# Allegro board DIF_1V2.brd
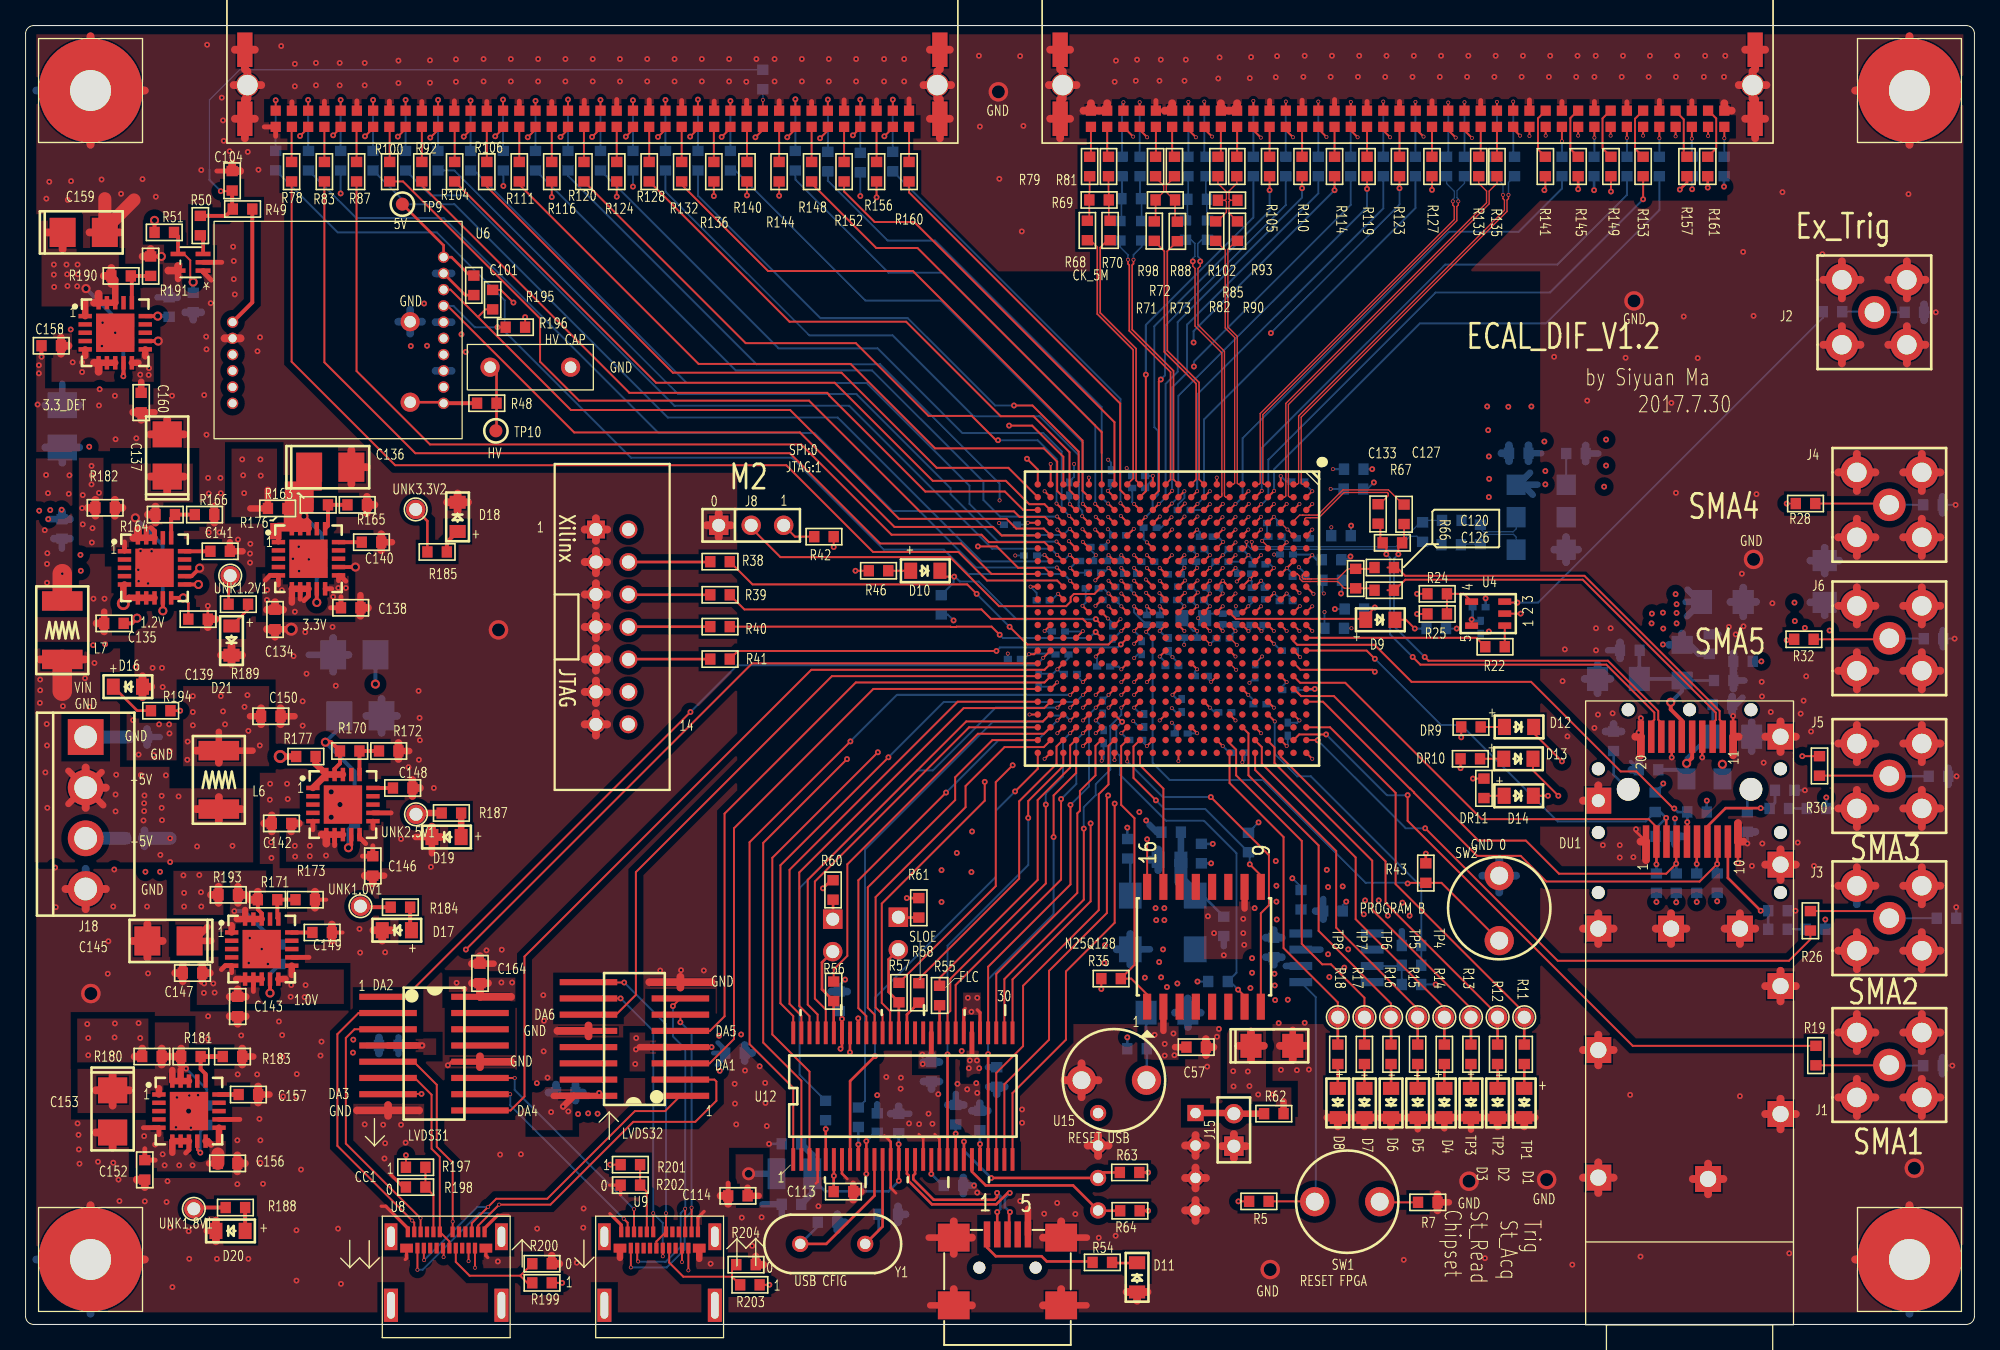
[diagram p0: board, top side]
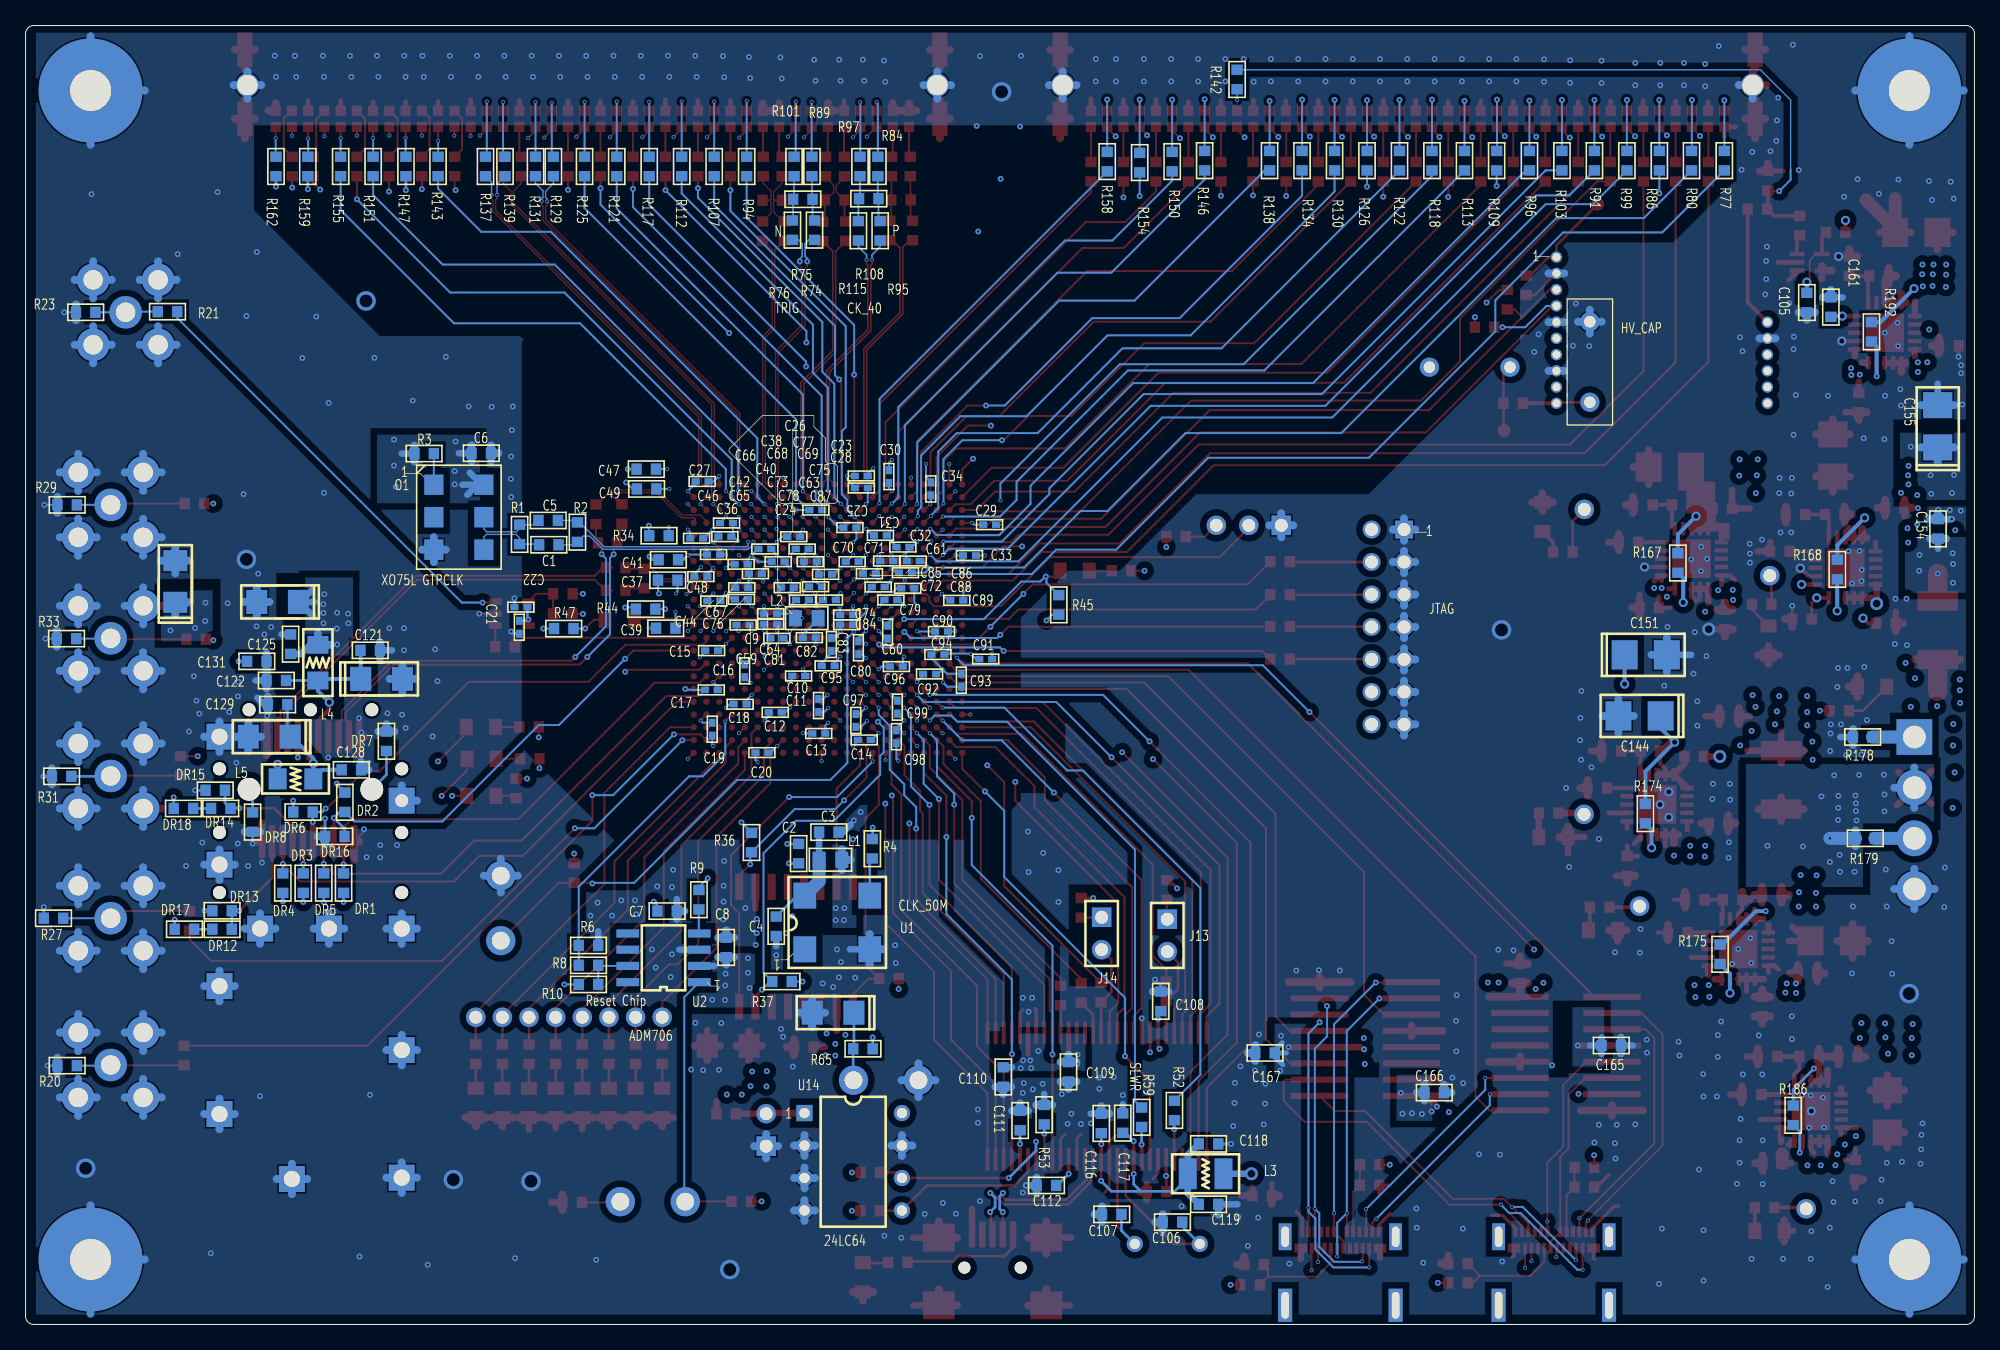
[diagram p1: board, bottom side, seen from below]

Outline 152.4 x 101.6 mm; copper layers: TOP, GND2, ART3, PLANE4, GND5, PLANE6, GND7, PLANE8, GND9, BOTTOM. Coordinates in mm from the lower left corner of the outline.
Outline path: 0,100.97 0,0.64 arc(0.19,0.19) 0.64,0 151.76,0 arc(152.21,0.19) 152.4,0.64 152.4,100.97 arc(152.21,101.41) 151.76,101.6 0.64,101.6 arc(0.19,101.41) 0,100.97

## Design rules (mm)
net group 5.0V_HV: nets N16783629 N16783633
net group CK_40M_F: nets N31992 N31996
net group CLK_5M_F: nets N31695 N31699
net group GTP1: nets N16065 N16069
net group GTP2: nets N16073 N16077
net group GTP_REFCLK: nets N63573 N65349
net group IN_MONITOR: nets IN_MONITOR N16789996
net group IO_PRE_2.5_1: nets IO_PRE_2.5_1 N16790016
net group IO_PRE_2.5_2: nets IO_PRE_2.5_2 N16840818
net group IO_PRE_2.5_3: nets IO_PRE_2.5_3 N16841427
net group IO_PRE_2.5_4: nets IO_PRE_2.5_4 N16790120
net group IO_PRE_2.5_5: nets IO_PRE_2.5_5 N16790006
net group IO_PRE_2.5_6: nets IO_PRE_2.5_6 N16841941
net group IO_PRE_2.5_7: nets IO_PRE_2.5_7 N16790130
net group IO_PRE_2.5_8: nets IO_PRE_2.5_8 N16790031
net group IO_PRE_2.5_9: nets IO_PRE_2.5_9 N16790140
net group IO_PRE_2.5_10: nets IO_PRE_2.5_10 N16790036
net group IO_PRE_2.5_11: nets IO_PRE_2.5_11 N16790145
net group IO_PRE_3.3_1: nets IO_PRE_3.3_1 N16783654
net group IO_PRE_3.3_2: nets IO_PRE_3.3_2 N1678375638
net group IO_PRE_3.3_3: nets IO_PRE_3.3_3 N16783650
net group IO_PRE_3.3_4: nets IO_PRE_3.3_4 N1678375636
net group IO_PRE_3.3_5: nets IO_PRE_3.3_5 N16783646
net group IO_PRE_3.3_6: nets IO_PRE_3.3_6 N1678375634
net group IO_PRE_3.3_7: nets IO_PRE_3.3_7 N16783642
net group IO_PRE_3.3_8: nets IO_PRE_3.3_8 N1678375632
net group IO_PRE_3.3_9: nets IO_PRE_3.3_9 N16783637
net group IO_PRE_3.3_10: nets IO_PRE_3.3_10 N1678375628
net group IO_PRE_3.3_11: nets IO_PRE_3.3_11 N16783603
net group IO_PRE_3.3_12: nets IO_PRE_3.3_12 N1678375618
net group IO_PRE_3.3_13: nets IO_PRE_3.3_13 N1678375624
net group IO_PRE_3.3_14: nets IO_PRE_3.3_14 N16783624
net group IO_PRE_3.3_15: nets IO_PRE_3.3_15 N1678375626
net group N65373: nets N65373 N607665
net group N606320: nets N65361 N606320
net group N16783572: nets N39711 N16783572
net group N16783577: nets N39253 N16783577
net group N16783581: nets N38992 N16783581
net group N16783585: nets N34554 N16783585
net group N16783590: nets N38404 N16783590
net group N16783594: nets N38396 N16783594
net group N16783598: nets N36779 N16783598
net group N16783607: nets N40733 N16783607
net group N16783611: nets N42476 N16783611
net group N16783616: nets N42251 N16783616
net group N16783620: nets N41303 N16783620
net group N16789976: nets N33890 N16789976
net group N16789981: nets N28287 N16789981
net group N16789986: nets N27930 N16789986
net group N16789991: nets N27061 N16789991
net group N16790001: nets N29237 N16790001
net group N16790021: nets N72632 N16790021
net group N16790026: nets N16790026 N16790135
net group N16790085: nets N33886 N16790085
net group N16790090: nets N27703 N16790090
net group N16790095: nets N26834 N16790095
net group N16790100: nets N73220 N16790100
net group N16790105: nets N29233 N16790105
net group N16790110: nets N71766 N16790110
net group N167837560: nets N39940 N167837560
net group N167837562: nets N39482 N167837562
net group N167837564: nets N73812 N167837564
net group N167837566: nets N38635 N167837566
net group N167837568: nets N34550 N167837568
net group N1678375610: nets N38400 N1678375610
net group N1678375612: nets N36552 N1678375612
net group N1678375614: nets N37008 N1678375614
net group N1678375616: nets N40729 N1678375616
net group N1678375620: nets N42480 N1678375620
net group N1678375622: nets N42028 N1678375622
net group N1678375630: nets N64910 N1678375630
net group OUT_CK_5N_1: nets N16790060 OUT_CK_5N_1
net group OUT_CK_5P_1: nets N1679025740 OUT_CK_5P_1
net group OUT_CK_40N_1: nets N16838243 OUT_CK_40N_1
net group OUT_CK_40P_1: nets N16789956 OUT_CK_40P_1
net group OUT_RAZ_CHN_N_1: nets N16790080 OUT_RAZ_CHN_N_1
net group OUT_RAZ_CHN_P_1: nets N16839910 OUT_RAZ_CHN_P_1
net group OUT_TRIG_EXT_N_1: nets N16839386 OUT_TRIG_EXT_N_1
net group OUT_TRIG_EXT_P_1: nets N16789966 OUT_TRIG_EXT_P_1
net group OUT_VAL_EVT_N_1: nets N16790070 OUT_VAL_EVT_N_1
net group OUT_VAL_EVT_P_1: nets N16838862 OUT_VAL_EVT_P_1
net group RAZ_CHN_F: nets N33117 N33121
net group REFCLK: nets REFCLK+ REFCLK-
net group SFP_RD: nets GTP0_RD+ GTP0_RD-
net group SFP_TD: nets GTP0_TD+ GTP0_TD-
net group TRIG_EXP_F: nets N32289 N32293
net group USB_DATA: nets N16778188 N16778190
net group VAL_EVT_F: nets N31078 N31082
net group 1.2V: nets N17024
net group 3.3V_OUT_DET: nets N16790041 N16790052 N16790150 N16790155

## Placement (name value [footprint] x y rotation side)
C1  0.1u  [SC0603]  111.48 60.99 180 bottom
C2  0.1u  [SC0603]  91.95 36.83 270 bottom
C3  0.01u  [SC0603]  89.59 38.51 0 bottom
C4  1000p  [SC0603]  93.7 31.14 90 bottom
C5  0.1u  [SC0603]  111.53 62.89 180 bottom
C6  0.01u  [SC0603]  116.76 68.15 180 bottom
C7  0.01u  [SC0603]  102.23 32.33 180 bottom
C8  1u  [SC0603]  97.61 29.49 90 bottom
C9  1uf  [SC0402]  93.65 53.67 0 bottom
C10  0.01uf  [SC0402]  91.95 50.72 180 bottom
C11  1uf  [SC0402]  90.4 48.41 270 bottom
C12  0.01uf  [SC0402]  93.78 47.88 180 bottom
C13  1uf  [SC0402]  90.37 46.23 180 bottom
C14  0.01uf  [SC0402]  86.82 45.72 180 bottom
C15  1uf  [SC0402]  98.76 52.7 180 bottom
C16  0.01uf  [SC0402]  96.16 51.13 270 bottom
C17  1uf  [SC0402]  98.78 49.63 180 bottom
C18  0.01uf  [SC0402]  96.52 48.51 180 bottom
C19  1uf  [SC0402]  98.7 46.56 90 bottom
C20  0.01uf  [SC0402]  94.82 44.73 180 bottom
C21  0.1uF  [SC0402]  113.79 54.53 270 bottom
C22  0.01uf  [SC0402]  113.67 56.11 0 bottom
C23  1uf  [SC0402]  87.05 66.37 180 bottom
C24  0.01uf  [SC0402]  90.6 63.7 180 bottom
C25  1uf  [SC0402]  87.93 62.33 180 bottom
C26  0.01uf  [SC0402]  92.33 61.62 180 bottom
C27  1uf  [SC0402]  99.49 65.94 0 bottom
C28  0.01uf  [SC0402]  87.05 65.43 180 bottom
C29  1uf  [SC0402]  77.01 62.56 180 bottom
C30  0.01uf  [SC0402]  84.89 66.32 90 bottom
C31  1uf  [SC0402]  85.55 61.72 180 bottom
C32  0.01uf  [SC0402]  83.79 60.81 0 bottom
C33  1uf  [SC0402]  78.59 60.15 180 bottom
C34  0.01uf  [SC0402]  81.61 65.35 90 bottom
C36  0.1uF  [SC0402]  98.6 60.22 0 bottom
C37  4.7uf  [SC0603]  102.18 58.22 0 bottom
C38  0.1uF  [SC0402]  94.59 60.66 180 bottom
C39  4.7uf  [SC0603]  102.34 54.46 0 bottom
C40  0.1uF  [SC0402]  95.33 58.72 180 bottom
C41  4.7uf  [SC0603]  102.13 59.82 180 bottom
C42  0.1uF  [SC0402]  97.59 62.69 0 bottom
C44  0.1uF  [SC0402]  98.58 56.59 0 bottom
C46  0.1uF  [SC0402]  99.92 61.49 0 bottom
C47  4.7uf  [SC0603]  103.86 66.9 0 bottom
C48  0.1uF  [SC0402]  99.59 58.5 0 bottom
C49  4.7uf  [SC0603]  103.84 65.35 0 bottom
C57  0.1uF  [SC0603]  91.54 21.69 0 top
C58  10uF  [CT1206]  97.46 21.79 0 top
C59  1uf  [SC0402]  96.29 54.71 0 bottom
C60  0.01uf  [SC0402]  84.99 54.15 270 bottom
C61  1uf  [SC0402]  82.98 59.72 180 bottom
C63  1uf  [SC0402]  90.63 57.71 180 bottom
C64  0.01uf  [SC0402]  94.13 55.6 0 bottom
C65  1uf  [SC0402]  97.71 61.62 0 bottom
C66  0.01uf  [SC0402]  96.44 59.46 0 bottom
C67  1uf  [SC0402]  96.39 57.63 0 bottom
C68  0.01uf  [SC0402]  93.55 59.66 180 bottom
C69  1uf  [SC0402]  91.03 59.66 180 bottom
C70  0.01uf  [SC0402]  87.76 59.66 180 bottom
C71  1uf  [SC0402]  85.06 59.72 180 bottom
C72  0.01uf  [SC0402]  85.72 57.68 180 bottom
C73  1uf  [SC0402]  92.84 57.63 180 bottom
C74  0.01uf  [SC0402]  88.19 55.5 0 bottom
C75  1uf  [SC0402]  89.84 58.67 0 bottom
C76  0.01uf  [SC0402]  96.42 56.72 180 bottom
C77  1uf  [SC0402]  91.67 60.66 180 bottom
C78  0.01uf  [SC0402]  91.64 56.67 180 bottom
C79  1uf  [SC0402]  84.73 56.67 180 bottom
C80  0.01uf  [SC0402]  87.27 52.93 270 bottom
C81  1uf  [SC0402]  94.13 54.76 0 bottom
C82  0.01uf  [SC0402]  91.11 53.72 180 bottom
C83  1uf  [SC0402]  89.38 53.19 270 bottom
C84  0.01uf  [SC0402]  88.19 54.74 180 bottom
C85  1uf  [SC0402]  86.41 58.72 180 bottom
C86  0.01uf  [SC0402]  83.59 58.8 180 bottom
C87  1uf  [SC0402]  89.53 56.67 180 bottom
C88  0.01uf  [SC0402]  83.41 57.58 180 bottom
C89  1uf  [SC0402]  79.58 56.64 180 bottom
C90  0.01uf  [SC0402]  80.77 54.2 180 bottom
C91  1uf  [SC0402]  77.32 52.04 180 bottom
C92  0.01uf  [SC0402]  81.71 50.88 180 bottom
C93  1uf  [SC0402]  79.22 50.39 90 bottom
C94  0.01uf  [SC0402]  81.05 52.4 0 bottom
C95  1uf  [SC0402]  89.64 51.51 0 bottom
C96  0.01uf  [SC0402]  84.3 51.46 180 bottom
C97  1uf  [SC0402]  87.48 47.24 270 bottom
C98  0.01uf  [SC0402]  84.3 45.97 270 bottom
C99  1uf  [SC0402]  84.23 48.29 90 bottom
C101  0.1u  [SC0603]  35.05 81.28 90 top
C102  47n  [CHV]  30.07 72.14 90 bottom
C103  47n  [CHV]  36.32 74.88 0 top
C104  0.1u  [SC0603]  16.15 89.46 90 top
C105  0.1u  [SC0603]  13.11 79.93 270 bottom
C106  12pF  [SC0603]  62.71 8 180 bottom
C107  12pF  [SC0603]  67.46 8.61 180 bottom
C108  0.1uF  [SC0603]  63.63 25.27 270 bottom
C109  0.1uF  [SC0603]  70.84 19.76 90 bottom
C110  0.1uF  [SC0603]  75.95 19.35 90 bottom
C111  0.1uF  [SC0603]  74.63 15.95 270 bottom
C112  0.1uF  [SC0603]  72.57 10.87 180 bottom
C113  0.1uF  [SC0603]  63.96 10.39 180 top
C114  0.1uF  [SC0603]  55.7 10.06 0 top
C115  10uF  [CT1206]  89.26 24.38 0 bottom
C116  0.1uF  [SC0603]  68.28 15.72 270 bottom
C117  0.1uF  [SC0603]  66.6 15.75 270 bottom
C118  10uF  [SC0603]  59.89 14.12 0 bottom
C119  0.1uF  [SC0603]  59.89 9.4 0 bottom
C120  0.1uF  [SC0603]  106.25 59.21 180 top
C121  1uF  [SC0603]  125.45 52.73 180 bottom
C122  0.1uF  [SC0603]  132.79 50.37 0 bottom
C123  10uF  [CT1206]  124.56 50.5 180 bottom
C124  10uF  [CT1206]  140.69 58.12 90 bottom
C125  0.1uF  [SC0603]  131.67 53.21 90 bottom
C126  0.1uF  [SC0603]  106.25 57.43 180 top
C127  0.1uF  [SC0603]  107.8 63.37 270 top
C128  1uF  [SC0603]  126.92 43.38 180 bottom
C129  0.1uF  [SC0603]  132.69 48.49 0 bottom
C130  10uF  [CT1206]  133.35 45.97 0 bottom
C131  0.1uF  [SC0603]  134.32 51.87 180 bottom
C132  10uF  [CT1206]  132.69 56.52 0 bottom
C133  0.1uF  [SC0603]  105.77 63.4 270 top
C134  1u  [SC0603]  19.51 55.14 270 top
C135  1u  [SC0603]  6.91 54.84 180 top
C136  10u  [STC3528]  23.83 67.06 0 top
C137  10u  [STC3528]  11.07 67.97 90 top
C138  1u  [SC0603]  25.43 56.06 0 top
C139  1u  [SC0603]  13.49 55.17 0 top
C140  470p  [SC0603]  27.05 61.19 0 top
C141  470p  [SC0603]  15.21 60.48 0 top
C142  1u  [SC0603]  20.02 39.19 180 top
C143  1u  [SC0603]  16.59 24.87 270 top
C144  10u  [STC3528]  26.19 47.6 0 bottom
C145  10u  [STC3528]  11.18 30 180 top
C146  1u  [SC0603]  27.15 35.86 270 top
C147  1u  [SC0603]  13.06 27.48 180 top
C148  470p  [SC0603]  29.49 41.96 0 top
C149  470p  [SC0603]  23.19 30.66 0 top
C150  0.1u  [SC0603]  19.18 47.57 0 top
C151  10u  [STC3528]  25.7 52.37 180 bottom
C152  1u  [SC0603]  9.32 12.09 270 top
C153  10u  [STC3528]  6.81 16.66 270 top
C154  0.1u  [SC0603]  2.84 62.23 90 bottom
C155  10u  [STC3528]  2.87 70.26 90 bottom
C156  1u  [SC0603]  15.8 12.6 0 top
C157  470p  [SC0603]  17.42 17.98 0 top
C158  1u  [SC0603]  2.01 76.56 180 top
C159  10u  [STC3528]  4.55 85.42 0 top
C160  1u  [SC0603]  9.04 72.11 270 top
C161  470p  [SC0603]  11.23 79.58 90 bottom
C164  0.1uF  [SC0603]  35.53 27.46 270 top
C165  0.1uF  [SC0603]  28.4 21.82 0 bottom
C166  0.1uF  [SC0603]  42.24 18.14 0 bottom
C167  0.1uF  [SC0603]  55.47 21.23 180 bottom
D1  LED  [SD0805]  117.2 17.32 90 top
D2  LED  [SD0805]  115.11 17.32 90 top
D3  LED  [SD0805]  113.03 17.32 90 top
D4  LED  [SD0805]  110.95 17.32 90 top
D5  LED  [SD0805]  108.86 17.32 90 top
D6  LED  [SD0805]  106.78 17.32 90 top
D7  LED  [SD0805]  104.7 17.32 90 top
D8  LED  [SD0805]  102.62 17.32 90 top
D9  LED  [SD0805]  105.94 55.12 180 top
D10  LED  [SD0805]  70.36 58.95 180 top
D11  LED  [SD0805]  86.92 3.68 270 top
D12  LED  [SD0805]  116.79 46.74 180 top
D13  LED  [SD0805]  116.74 44.25 180 top
D14  LED  [SD0805]  116.76 41.35 180 top
D16  Green  [SD0805]  8 49.89 0 top
D17  LED  [SD0805]  29.03 30.84 0 top
D18  LED  [SD0805]  33.78 63.17 270 top
D19  LED  [SD0805]  32.92 38.13 0 top
D20  LED  [SD0805]  16.03 7.32 0 top
D21  LED  [SD0805]  16.1 53.49 90 top
DR1  4.7K  [SR0603]  127.53 34.52 270 bottom
DR2  4.7K  [SR0603]  127.43 40.84 90 bottom
DR3  4.7K  [SR0603]  130.68 34.52 270 bottom
DR4  4.7K  [SR0603]  132.28 34.52 270 bottom
DR5  4.7K  [SR0603]  129.08 34.52 270 bottom
DR6  4.7K  [SR0603]  130.71 40.08 0 bottom
DR7  null  [SR0603]  124.18 45.62 90 bottom
DR8  null  [SR0603]  134.65 39.29 270 bottom
DR9  4.7K  [SR0603]  113.03 46.74 180 top
DR10  4.7K  [SR0603]  112.98 44.25 180 top
DR11  4.7K  [SR0603]  114.05 41.94 90 top
DR12  4.7K  [SR0603]  137.03 30.91 0 bottom
DR13  4.7K  [SR0603]  137.03 32.36 0 bottom
DR14  4.7K  [SR0603]  137.13 40.36 0 bottom
DR15  4.7K  [SR0603]  137.57 41.78 0 bottom
DR16  4.7K  [SR0603]  128.22 38.18 0 bottom
DR17  4.7K  [SR0603]  139.98 30.91 180 bottom
DR18  4.7K  [SR0603]  140.06 40.36 180 bottom
DU1  74441-0010  [LASER22-4816-M]  126.72 37.77 90 top
J1  SMA  [CON-BNC-S-T]  145.75 20.29 0 top
J2  SMA  [CON-BNC-S-T]  144.58 79.17 0 top
J3  SMA  [CON-BNC-S-T]  145.75 31.78 0 top
J4  SMA  [CON-BNC-S-T]  145.75 64.11 0 top
J5  SMA  [CON-BNC-S-T]  145.75 42.9 0 top
J6  SMA  [CON-BNC-S-T]  145.75 53.67 0 top
J7  JTAG  [JTAG-14P]  41.38 67.31 270 top
J8  MSEL0  [SIP-3P]  56.74 62.51 0 top
J9  2mm_Hole  [2MM_HOLE]  147.32 96.52 0 top
J10  2mm_Hole  [2MM_HOLE]  147.32 5.08 0 top
J11  2mm_Hole  [2MM_HOLE]  5.08 96.52 0 top
J12  2mm_Hole  [2MM_HOLE]  5.08 5.08 0 top
J13  WU =1  [SIP-2P]  63.12 30.43 270 bottom
J14  WU2 =1  [SIP-2P]  68.25 30.58 270 bottom
J15  addrCS  [SIP-2P]  94.49 15.21 90 top
J16  CONN  [154744-ERNI]  19.56 94.95 90 top
J17  CONN  [154744-ERNI]  83.31 94.95 90 top
J18  Power In  [SIP-4P-156]  4.7 40.01 270 top
L1  BEAD  [SL0805]  89.46 36.35 0 bottom
L2  BEAD  [SL0805]  91.31 55.24 180 bottom
L3  Bead  [SL1210]  60.12 11.79 0 bottom
L4  39mH  [SL1206]  129.54 51.77 90 bottom
L5  39mH  [SL1206]  131.29 42.67 0 bottom
L6  10uH  [SL1812]  15.11 42.6 90 top
L7  10uH  [SL1812]  2.87 54.31 90 top
NOREF  -  []  0 0.64 90 top
NOREF#2  -  []  83.85 81.08 0 top
NOREF#3  -  []  93.97 88.57 0 top
NOREF#4  -  []  5.08 5.08 90 top
NOREF#5  -  []  86.39 93.5 0 top
NOREF#6  -  []  89.13 92.66 0 top
NOREF#7  -  []  91.62 93.22 0 top
NOREF#8  -  []  0.64 101.6 0 top
NOREF#9  -  []  46.3 14.96 0 top
NOREF#10  -  []  111.86 86.92 0 top
NOREF#11  -  []  91.54 81.51 0 top
NOREF#12  -  []  89.26 82.5 0 top
NOREF#13  -  []  31.98 16.97 0 top
NOREF#14  -  []  117.42 58.39 0 top
NOREF#15  -  []  93.83 82.73 0 top
NOREF#16  -  []  74.09 9.55 0 top
NOREF#17  -  []  84.05 88.01 0 top
NOREF#18  -  []  86.42 88.7 0 top
NOREF#19  -  []  119.02 51.82 0 top
NOREF#20  -  []  101.57 63.63 0 top
NOREF#21  -  []  91.72 88.39 0 top
NOREF#22  -  []  114.73 61.87 0 top
NOREF#23  -  []  24.87 21.59 0 top
NOREF#24  -  []  104.62 60.76 0 top
NOREF#25  -  []  84.38 93.14 0 top
NOREF#26  -  []  88.92 88.6 0 top
NOREF#27  -  []  101.9 58.17 0 top
NOREF#28  -  []  86.23 81.56 0 top
NOREF#29  -  []  114.43 92.94 0 top
NOREF#30  -  []  40.82 15.16 0 top
NOREF#31  -  []  5.08 96.52 0 top
NOREF#32  -  []  115.67 88.06 0 top
NOREF#33  -  []  51.94 13.79 0 top
NOREF#34  -  []  114.33 87.96 0 top
NOREF#35  -  []  48.34 24.51 0 top
NOREF#36  -  []  94.13 92.15 0 top
O1  100M  [XO75L]  118.52 63.14 270 bottom
R1  null  [SR0603]  113.77 61.8 90 bottom
R2  100  [SR0603]  109.25 61.98 90 bottom
R3  4.7K  [SR0603]  121.23 68.12 0 bottom
R4  33  [SR0603]  86.18 37.21 90 bottom
R5  10k  [SR0603]  96.44 9.63 180 top
R6  330  [SR0603]  108.38 29.64 0 bottom
R7  1k  [SR0603]  109.65 9.55 0 top
R8  100  [SR0603]  108.38 28.09 180 bottom
R9  100k  [SR0603]  99.75 33.22 90 bottom
R10  100k  [SR0603]  108.38 26.59 180 bottom
R11  1k  [SR0603]  117.2 21.13 270 top
R12  1k  [SR0603]  115.11 21.13 270 top
R13  1k  [SR0603]  113.03 21.13 270 top
R14  1k  [SR0603]  110.95 21.13 270 top
R15  1k  [SR0603]  108.86 21.13 270 top
R16  1k  [SR0603]  106.78 21.13 270 top
R17  1k  [SR0603]  104.7 21.13 270 top
R18  1k  [SR0603]  102.62 21.13 270 top
R19  test  [SR0603]  140 21.03 90 top
R20  test  [SR0603]  149.15 20.24 0 bottom
R21  0  [SR0603]  141.3 79.22 180 bottom
R22  33  [SR0603]  114.91 53.01 180 top
R23  50  [SR0603]  147.7 79.17 0 bottom
R24  3k  [SR0603]  110.39 57.15 180 top
R25  4k  [SR0603]  110.39 55.58 180 top
R26  test  [SR0603]  139.57 31.57 270 top
R27  test  [SR0603]  150.22 31.78 0 bottom
R28  test  [SR0603]  139.19 64.21 180 top
R29  test  [SR0603]  149.15 64.11 0 bottom
R30  test  [SR0603]  140.28 43.69 90 top
R31  test  [SR0603]  149.58 42.88 0 bottom
R32  test  [SR0603]  139.06 53.59 180 top
R33  test  [SR0603]  149.2 53.64 0 bottom
R34  100  [SR0603]  102.87 61.7 0 bottom
R35  4.7K  [SR0603]  84.89 27.05 180 top
R36  4.7K  [SR0603]  95.63 37.69 90 bottom
R37  4.7K  [SR0603]  93.24 26.82 180 bottom
R38  33  [SR0603]  54.31 59.66 0 top
R39  33  [SR0603]  54.31 57.07 0 top
R40  33  [SR0603]  54.31 54.58 0 top
R41  33  [SR0603]  54.31 52.04 0 top
R42  4.7K  [SR0603]  62.43 61.62 180 top
R43  4.7K  [SR0603]  109.5 35.31 90 top
R44  300  [SR0603]  103.91 55.96 180 bottom
R45  4.7K  [SR0603]  71.6 56.29 270 bottom
R46  300  [SR0603]  66.7 58.95 180 top
R47  220  [SR0603]  110.31 54.43 180 bottom
R48  10  [SR0603]  36.07 72.06 0 top
R49  1k  [SR0603]  16.97 87.25 0 top
R50  1.5k  [SR0603]  13.67 85.95 270 top
R51  10  [SR0603]  10.85 85.42 0 top
R52  0  [SR0603]  62.56 16.74 270 bottom
R53  10k  [SR0603]  72.75 16.41 270 bottom
R54  4.7k  [SR0603]  84.2 4.85 180 top
R55  0  [SR0603]  71.48 25.73 90 top
R56  0 or null  [SR0603]  63.2 26.06 270 top
R57  0 or null  [SR0603]  68.3 25.96 270 top
R58  0  [SR0603]  69.85 25.93 90 top
R59  0  [SR0603]  65.13 16.21 90 bottom
R60  0  [SR0603]  63.14 33.99 90 top
R61  0  [SR0603]  69.85 32.59 90 top
R62  10k  [SR0603]  97.61 16.48 0 top
R63  2.2k  [SR0603]  86.33 11.89 0 top
R64  2.2k  [SR0603]  86.36 8.89 0 top
R65  20k  [SR0603]  86.92 21.56 180 bottom
R66  100  [SR0603]  104.01 58.34 90 top
R67  100  [SR0603]  106.88 61.14 0 top
R68  0  [SR0603]  83.03 85.57 90 top
R69  100  [SR0603]  83.95 87.96 180 top
R70  0  [SR0603]  84.81 85.57 270 top
R71  0  [SR0603]  88.27 85.52 90 top
R72  100  [SR0603]  89.13 87.96 180 top
R73  0  [SR0603]  90.07 85.5 270 top
R74  0  [SR0603]  90.7 85.6 90 bottom
R75  100  [SR0603]  91.62 88.01 180 bottom
R76  0  [SR0603]  92.43 85.6 270 bottom
R77  0  [SR0603]  19.56 91.03 90 bottom
R78  0  [SR0603]  20.8 90.17 270 top
R79  0  [SR0603]  83.21 90.58 270 top
R80  0  [SR0603]  22.12 91.03 90 bottom
R81  0  [SR0603]  84.68 90.58 270 top
R82  0  [SR0603]  93.07 85.52 90 top
R83  0  [SR0603]  23.37 90.17 270 top
R84  0  [SR0603]  85.75 90.58 90 bottom
R85  100  [SR0603]  94.01 87.93 180 top
R86  0  [SR0603]  24.64 91.03 90 bottom
R87  0  [SR0603]  25.88 90.17 270 top
R88  0  [SR0603]  89.84 90.58 270 top
R89  0  [SR0603]  90.91 90.58 90 bottom
R90  0  [SR0603]  94.77 85.52 270 top
R91  0  [SR0603]  29.72 91.03 90 bottom
R92  0  [SR0603]  30.99 90.17 270 top
R93  0  [SR0603]  94.72 90.58 270 top
R94  0  [SR0603]  96.01 90.58 90 bottom
R95  0  [SR0603]  85.57 85.55 90 bottom
R96  0  [SR0603]  34.8 91.03 90 bottom
R97  0  [SR0603]  87.15 90.58 90 bottom
R98  0  [SR0603]  88.37 90.58 270 top
R99  0  [SR0603]  27.18 91.03 90 bottom
R100  0  [SR0603]  28.47 90.17 270 top
R101  0  [SR0603]  92.3 90.58 90 bottom
R102  0  [SR0603]  93.24 90.58 270 top
R103  0  [SR0603]  32.26 91.03 90 bottom
R104  0  [SR0603]  33.55 90.17 270 top
R105  0  [SR0603]  97.28 90.58 270 top
R106  0  [SR0603]  36.07 90.17 270 top
R107  0  [SR0603]  98.55 90.58 90 bottom
R108  100  [SR0603]  86.46 88.06 180 bottom
R109  0  [SR0603]  37.36 91.03 90 bottom
R110  0  [SR0603]  99.82 90.58 270 top
R111  0  [SR0603]  38.61 90.17 270 top
R112  0  [SR0603]  101.09 90.58 90 bottom
R113  0  [SR0603]  39.88 91.03 90 bottom
R114  0  [SR0603]  102.36 90.58 270 top
R115  0  [SR0603]  87.27 85.55 270 bottom
R116  0  [SR0603]  41.15 90.17 270 top
R117  0  [SR0603]  103.63 90.58 90 bottom
R118  0  [SR0603]  42.42 91.03 90 bottom
R119  0  [SR0603]  104.9 90.58 270 top
R120  0  [SR0603]  43.66 90.17 270 top
R121  0  [SR0603]  106.17 90.58 90 bottom
R122  0  [SR0603]  44.96 91.03 90 bottom
R123  0  [SR0603]  107.44 90.58 270 top
R124  0  [SR0603]  46.23 90.17 270 top
R125  0  [SR0603]  108.69 90.58 90 bottom
R126  0  [SR0603]  47.5 91.03 90 bottom
R127  0  [SR0603]  109.98 90.58 270 top
R128  0  [SR0603]  48.77 90.17 270 top
R129  0  [SR0603]  111.12 90.58 90 bottom
R130  0  [SR0603]  50.04 91.03 90 bottom
R131  0  [SR0603]  112.52 90.58 90 bottom
R132  0  [SR0603]  51.31 90.17 270 top
R133  0  [SR0603]  113.64 90.58 270 top
R134  0  [SR0603]  52.58 91.03 90 bottom
R135  0  [SR0603]  115.06 90.58 270 top
R136  0  [SR0603]  53.82 90.17 270 top
R137  0  [SR0603]  116.43 90.58 90 bottom
R138  0  [SR0603]  55.12 91.03 90 bottom
R139  0  [SR0603]  114.91 90.58 90 bottom
R140  0  [SR0603]  56.41 90.17 270 top
R141  0  [SR0603]  118.85 90.58 90 top
R142  0  [SR0603]  57.66 97.38 270 bottom
R143  0  [SR0603]  120.14 90.58 270 bottom
R144  0  [SR0603]  58.93 90.17 270 top
R145  0  [SR0603]  121.41 90.58 90 top
R146  0  [SR0603]  60.2 91.03 90 bottom
R147  0  [SR0603]  122.66 90.58 270 bottom
R148  0  [SR0603]  61.47 90.17 270 top
R149  0  [SR0603]  123.98 90.58 90 top
R150  0  [SR0603]  62.74 90.96 90 bottom
R151  0  [SR0603]  125.22 90.58 270 bottom
R152  0  [SR0603]  64.01 90.17 270 top
R153  0  [SR0603]  126.49 90.58 90 top
R154  0  [SR0603]  65.28 90.88 90 bottom
R155  0  [SR0603]  127.76 90.58 270 bottom
R156  0  [SR0603]  66.55 90.17 270 top
R157  0  [SR0603]  129.92 90.58 90 top
R158  0  [SR0603]  67.82 90.96 90 bottom
R159  0  [SR0603]  130.33 90.58 270 bottom
R160  0  [SR0603]  69.09 90.17 270 top
R161  0  [SR0603]  131.55 90.58 90 top
R162  0  [SR0603]  132.82 90.58 270 bottom
R163  3.57k  [SR0603]  22.89 64.11 0 top
R164  2.49k  [SR0603]  10.92 63.35 0 top
R165  1.15k  [SR0603]  25.93 64.11 0 top
R166  4.99k  [SR0603]  14 63.35 0 top
R167  100k  [SR0603]  23.19 59.56 90 bottom
R168  100k  [SR0603]  10.72 59.05 90 bottom
R170  3.57k  [SR0603]  25.35 44.86 0 top
R171  1.13k  [SR0603]  18.92 33.22 0 top
R172  1.69k  [SR0603]  28.4 44.86 0 top
R173  4.53k  [SR0603]  21.87 33.22 0 top
R174  100k  [SR0603]  25.73 39.95 90 bottom
R175  100k  [SR0603]  19.89 28.96 90 bottom
R176  0  [SR0603]  19.71 63.83 180 top
R177  0  [SR0603]  21.92 44.42 180 top
R178  0  [SR0603]  8.74 45.95 0 bottom
R179  0  [SR0603]  8.53 38.02 0 bottom
R180  0  [SR0603]  9.88 20.95 180 top
R181  3.57k  [SR0603]  12.93 20.95 0 top
R182  0  [SR0603]  6.22 63.88 180 top
R183  2.87k  [SR0603]  16.18 20.95 0 top
R184  1.5k  [SR0603]  29.31 32.64 0 top
R185  1.5k  [SR0603]  32.18 60.43 0 top
R186  100k  [SR0603]  14.17 16.36 90 bottom
R187  1.5k  [SR0603]  33.3 40.01 0 top
R188  1.5k  [SR0603]  16.41 9.14 0 top
R189  1.5k  [SR0603]  16.64 56.34 0 top
R190  3.57k  [SR0603]  7.47 82.02 0 top
R191  1.15k  [SR0603]  9.78 82.78 90 top
R192  100k  [SR0603]  8.05 77.65 90 bottom
R193  0  [SR0603]  15.85 33.6 180 top
R194  1.5k  [SR0603]  10.57 48.01 180 top
R195  6.4k  [SR0603]  36.53 80.16 270 top
R196  6.4k  [SR0603]  38.3 78 180 top
R197  pull up  [SR0603]  30.51 12.29 180 top
R198  pull down  [SR0603]  30.51 10.74 0 top
R199  pull up  [SR0603]  40.39 3.25 0 top
R200  pull down  [SR0603]  40.39 4.75 180 top
R201  pull up  [SR0603]  47.29 12.5 180 top
R202  pull down  [SR0603]  47.29 10.9 0 top
R203  pull up  [SR0603]  56.64 3.1 0 top
R204  pull down  [SR0603]  56.34 4.67 180 top
SW1  pushbotton  [INDC2-200-M]  103.35 9.6 180 top
SW2  Button  [INDC2-200-M]  115.24 32.56 270 top
TP1  Signal  [GND40]  117.2 24.03 0 top
TP2  Signal  [GND40]  115.11 24.03 0 top
TP3  Signal  [GND40]  113.03 24.03 0 top
TP4  Signal  [GND40]  110.95 24.03 0 top
TP5  Signal  [GND40]  108.86 24.03 0 top
TP6  Signal  [GND40]  106.78 24.03 0 top
TP7  Signal  [GND40]  104.7 24.03 0 top
TP8  Signal  [GND40]  102.62 24.03 0 top
TP9  TEST POINT  [TP-40-SMD]  29.46 87.63 0 top
TP10  TEST POINT  [TP-40-SMD]  36.78 69.9 0 top
U1  osc  [SX4-0705]  88.93 31.45 180 bottom
U2  ADM706RAR  [SOP8-50-160]  102.51 28.68 90 bottom
U3  XC7A100T  [ARTIX7XCA100T484]  100.15 65.71 270 top
U4  ADCMP600  [SOT23-5]  114.38 55.6 90 top
U5  N25Q128  [SO16_50P300X413]  92.15 29.54 90 top
U6  C11204-01  [C11204_01]  34.14 86.28 180 top
U7  LM94021  [MAA05A]  12.9 83.08 180 top
U8  USBTypeCPlug  [USB_TYPEC_PLUG_V1]  32.89 5.97 0 top
U9  USBTypeCPlug  [USB_TYPEC_PLUG_V1]  49.58 5.97 0 top
U10  SN65LVDS31D  [CFP16ANDSOIC16]  28.57 16.03 0 top
U11  SN65LVDS32D  [CFP16ANDSOIC16]  50.98 27.48 180 top
U12  CY7C68013  [SOP56-25-300]  68.61 17.86 0 top
U13  USBCON  [CONN_USB_B_CHL]  76.78 3 0 top
U14  24LC64  [DIP8-100-300]  87.68 12.73 270 bottom
U15  PushButton  [INDC2-200-M]  85.12 19.1 0 top
U16  TPS74401  [QFN65P500X500-21]  22.12 59.89 0 top
U17  TPS74401  [QFN65P500X500-21]  10.08 59.18 0 top
U18  TPS74401  [QFN65P500X500-21]  18.47 29.36 0 top
U19  TPS74401  [QFN65P500X500-21]  24.82 40.67 0 top
U20  TPS74401  [QFN65P500X500-21]  12.78 16.69 0 top
U21  TPS74401  [QFN65P500X500-21]  7.01 77.57 0 top
UNK1.0V1  3.3V  [GND40]  26.19 32.72 0 top
UNK1.2V1  3.3V  [GND40]  16 58.57 0 top
UNK1.8V1  1.2V  [GND40]  13.16 9.04 0 top
UNK2.5V1  3.3V  [GND40]  30.53 39.9 0 top
UNK3.3V2  3.3V  [GND40]  30.51 63.75 0 top
Y1  24MHz  [XTAL2-200A]  63.12 6.3 180 top

## Library data of the parts
C1 C5 C6 = C NP
C2 = C: signal model: DEFAULT_CAPACITOR_1e-07pF_1_2
C3 = C: signal model: DEFAULT_CAPACITOR_1e-08pF_1_2
C4 = C: signal model: DEFAULT_CAPACITOR_1e-09pF_1_2
C7 = CAP NP: signal model: DEFAULT_CAPACITOR_1e-08pF_1_2
C8 = CAP NP: signal model: DEFAULT_CAPACITOR_1e-06pF_1_2
C9 C11 C13 C15 C17 C19 C23 C25 C27 C29 C31 C33 C65 C67 C69 C71 C73 C75 C77 C79 C81 C83 C85 C87 C89 C91 C93 C95 C97 C99 = CAP NP: signal model: DEFAULT_CAPACITOR_1e+06pF_1_2
C10 C12 C14 C16 C18 C20 C24 C26 C28 C30 C32 C34 C66 C68 C70 C72 C74 C76 C78 C80 C82 C84 C86 C88 C90 C92 C94 C96 C98 = CAP NP: signal model: DEFAULT_CAPACITOR_10000pF_1_2
C21 C22 C57 C59-C61 C63 C64 C101-C114 C116-C122 C125-C129 C131 C133 C164-C167 = CAP NP
C36 C38 C40 C42 C44 C46 C48 = CAP NP: signal model: DEFAULT_CAPACITOR_100000pF_1_2
C37 C39 C41 C47 C49 = CAP NP: signal model: DEFAULT_CAPACITOR_4.7e+06pF_1_2
C58 C123 C124 C130 C132 = C
C115 = CAP POL
C134 C135 C138-C143 C146-C150 C152 C154 C156-C158 C160 C161 = Capacitor np
C136 C137 C144 C145 C151 C153 C155 C159 = Capacitor pol
D1-D14 D16-D21 = LED
DR1-DR18 R1-R3 R11-R33 R35-R76 R82 R85 R90 R95 R108 R115 R184 R185 R187-R189 R195-R204 = R
DU1 = 74441-0010
J1-J6 = SMA_0
J7 = JTAG
J8 = CON3
J9-J12 = 2mm_Hole
J13-J15 = CON2
J16 J17 = CONN_1
J18 = 4 HEADER
L1 = INDUCTOR: signal model: DEFAULT_INDUCTOR_0.001nH_1_2
L2-L5 = INDUCTOR
L6 L7 = Inductor
O1 = OSC_DIFF
R4 = R: signal model: DEFAULT_RESISTOR_33.000000OHM_1_2
R5 = R: signal model: DEFAULT_RESISTOR_10000OHM_1_2
R6 = R: signal model: DEFAULT_RESISTOR_330.000000OHM_1_2
R7 = R: signal model: DEFAULT_RESISTOR_1000.000000OHM_1_2
R8 R34 R80 R83 R84 R86-R89 R91-R94 R96-R107 R109-R114 R116-R162 = R: signal model: DEFAULT_RESISTOR_100.000000OHM_1_2
R9 R10 = R: signal model: DEFAULT_RESISTOR_100000OHM_1_2
R77-R79 R81 = R: signal model: DEFAULT_RESISTOR_0.001OHM_1_2
R163-R168 R170-R183 R186 R190-R194 = Resistor
SW1 = PushButton_1
SW2 = SW_PB_SPST
TP1-TP8 UNK1.0V1 UNK1.2V1 UNK1.8V1 UNK2.5V1 UNK3.3V2 = T POINT A
TP9 TP10 = TEST POINT
U1 = OSC_SMD
U2 = ADM706RAR
U3 = XC7A100T
U4 = ADCMP600
U5 = N25Q128
U6 = C11204-01
U7 = LM94021
U8 U9 = USBTypeCPlug
U10 = SN65LVDS31_0
U11 = DS26LV32AT
U12 = CY7C68013_1
U13 = USBCON
U14 = 24LC00
U15 = PushButton
U16-U21 = TPS74401
Y1 = XM/SM

## Footprints (pads in the part's own frame, mm; a bottom-side part is the same pattern mirrored in y, then rotated)
2MM_HOLE
  round 8.128 hole 3.2: 1(0,0)
154744-ERNI
  rect 2.7x1.199 smd: 1(-0.635,2.41) 2(4.765,2.41) 3(-0.635,-51.94) 4(4.765,-51.94)
  round 1.801 hole 1.6: 5(2,2.21) 6(2,-51.74)
  rect 0.8x0.8 smd: A1(0,0) A2(0,-1.27) A3(0,-2.54) A4(0,-3.81) A5(0,-5.08) A6(0,-6.35) A7(0,-7.62) A8(0,-8.89) A9(0,-10.16) A10(0,-11.43) A11(0,-12.7) A12(0,-13.97) A13(0,-15.24) A14(0,-16.51) A15(0,-17.78) A16(0,-19.05) A17(0,-20.32) A18(0,-21.59) A19(0,-22.86) A20(0,-24.13) A21(0,-25.4) A22(0,-26.67) A23(0,-27.94) A24(0,-29.21) A25(0,-30.48) A26(0,-31.75) A27(0,-33.02) A28(0,-34.29) A29(0,-35.56) A30(0,-36.83) A31(0,-38.1) A32(0,-39.37) A33(0,-40.64) A34(0,-41.91) A35(0,-43.18) A36(0,-44.45) A37(0,-45.72) A38(0,-46.99) A39(0,-48.26) A40(0,-49.53) B1(-1.27,0) B2(-1.27,-1.27) B3(-1.27,-2.54) B4(-1.27,-3.81) B5(-1.27,-5.08) B6(-1.27,-6.35) B7(-1.27,-7.62) B8(-1.27,-8.89) B9(-1.27,-10.16) B10(-1.27,-11.43) B11(-1.27,-12.7) B12(-1.27,-13.97) B13(-1.27,-15.24) B14(-1.27,-16.51) B15(-1.27,-17.78) B16(-1.27,-19.05) B17(-1.27,-20.32) B18(-1.27,-21.59) B19(-1.27,-22.86) B20(-1.27,-24.13) B21(-1.27,-25.4) B22(-1.27,-26.67) B23(-1.27,-27.94) B24(-1.27,-29.21) B25(-1.27,-30.48) B26(-1.27,-31.75) B27(-1.27,-33.02) B28(-1.27,-34.29) B29(-1.27,-35.56) B30(-1.27,-36.83) B31(-1.27,-38.1) B32(-1.27,-39.37) B33(-1.27,-40.64) B34(-1.27,-41.91) B35(-1.27,-43.18) B36(-1.27,-44.45) B37(-1.27,-45.72) B38(-1.27,-46.99) B39(-1.27,-48.26) B40(-1.27,-49.53)
ARTIX7XCA100T484
  round 0.5 smd: A1(0,0) A2(1,0) A3(2,0) A4(3,0) A5(4,0) A6(5,0) A7(6,0) A8(7,0) A9(8,0) A10(9,0) A11(10,0) A12(11,0) A13(12,0) A14(13,0) A15(14,0) A16(15,0) A17(16,0) A18(17,0) A19(18,0) A20(19,0) A21(20,0) A22(21,0) AA1(0,-20) AA2(1,-20) AA3(2,-20) AA4(3,-20) AA5(4,-20) AA6(5,-20) AA7(6,-20) AA8(7,-20) AA9(8,-20) AA10(9,-20) AA11(10,-20) AA12(11,-20) AA13(12,-20) AA14(13,-20) AA15(14,-20) AA16(15,-20) AA17(16,-20) AA18(17,-20) AA19(18,-20) AA20(19,-20) AA21(20,-20) AA22(21,-20) AB1(0,-21) AB2(1,-21) AB3(2,-21) AB4(3,-21) AB5(4,-21) AB6(5,-21) AB7(6,-21) AB8(7,-21) AB9(8,-21) AB10(9,-21) AB11(10,-21) AB12(11,-21) AB13(12,-21) AB14(13,-21) AB15(14,-21) AB16(15,-21) AB17(16,-21) AB18(17,-21) AB19(18,-21) AB20(19,-21) AB21(20,-21) AB22(21,-21) B1(0,-1) B2(1,-1) B3(2,-1) B4(3,-1) B5(4,-1) B6(5,-1) B7(6,-1) B8(7,-1) B9(8,-1) B10(9,-1) B11(10,-1) B12(11,-1) B13(12,-1) B14(13,-1) B15(14,-1) B16(15,-1) B17(16,-1) B18(17,-1) B19(18,-1) B20(19,-1) B21(20,-1) B22(21,-1) C1(0,-2) C2(1,-2) C3(2,-2) C4(3,-2) C5(4,-2) C6(5,-2) C7(6,-2) C8(7,-2) C9(8,-2) C10(9,-2) C11(10,-2) C12(11,-2) C13(12,-2) C14(13,-2) C15(14,-2) C16(15,-2) C17(16,-2) C18(17,-2) C19(18,-2) C20(19,-2) C21(20,-2) C22(21,-2) D1(0,-3) D2(1,-3) D3(2,-3) D4(3,-3) D5(4,-3) D6(5,-3) D7(6,-3) D8(7,-3) D9(8,-3) D10(9,-3) D11(10,-3) D12(11,-3) D13(12,-3) D14(13,-3) D15(14,-3) D16(15,-3) D17(16,-3) D18(17,-3) D19(18,-3) D20(19,-3) D21(20,-3) D22(21,-3) E1(0,-4) E2(1,-4) E3(2,-4) E4(3,-4) E5(4,-4) E6(5,-4) E7(6,-4) E8(7,-4) E9(8,-4) E10(9,-4) E11(10,-4) E12(11,-4) E13(12,-4) E14(13,-4) E15(14,-4) E16(15,-4) E17(16,-4) E18(17,-4) E19(18,-4) E20(19,-4) E21(20,-4) E22(21,-4) F1(0,-5) F2(1,-5) F3(2,-5) F4(3,-5) F5(4,-5) F6(5,-5) F7(6,-5) F8(7,-5) F9(8,-5) F10(9,-5) F11(10,-5) F12(11,-5) F13(12,-5) F14(13,-5) F15(14,-5) F16(15,-5) F17(16,-5) F18(17,-5) F19(18,-5) F20(19,-5) F21(20,-5) F22(21,-5) G1(0,-6) G2(1,-6) G3(2,-6) G4(3,-6) G5(4,-6) G6(5,-6) G7(6,-6) G8(7,-6) G9(8,-6) G10(9,-6) G11(10,-6) G12(11,-6) G13(12,-6) G14(13,-6) G15(14,-6) G16(15,-6) G17(16,-6) G18(17,-6) G19(18,-6) G20(19,-6) G21(20,-6) G22(21,-6) H1(0,-7) H2(1,-7) H3(2,-7) H4(3,-7) H5(4,-7) H6(5,-7) H7(6,-7) H8(7,-7) H9(8,-7) H10(9,-7) H11(10,-7) H12(11,-7) H13(12,-7) H14(13,-7) H15(14,-7) H16(15,-7) H17(16,-7) H18(17,-7) H19(18,-7) H20(19,-7) H21(20,-7) H22(21,-7) J1(0,-8) J2(1,-8) J3(2,-8) J4(3,-8) J5(4,-8) J6(5,-8) J7(6,-8) J8(7,-8) J9(8,-8) J10(9,-8) J11(10,-8) J12(11,-8) J13(12,-8) J14(13,-8) J15(14,-8) J16(15,-8) J17(16,-8) J18(17,-8) J19(18,-8) J20(19,-8) J21(20,-8) J22(21,-8) K1(0,-9) K2(1,-9) K3(2,-9) K4(3,-9) K5(4,-9) K6(5,-9) K7(6,-9) K8(7,-9) K9(8,-9) K10(9,-9) K11(10,-9) K12(11,-9) K13(12,-9) K14(13,-9) K15(14,-9) K16(15,-9) K17(16,-9) K18(17,-9) K19(18,-9) K20(19,-9) K21(20,-9) K22(21,-9) L1(0,-10) L2(1,-10) L3(2,-10) L4(3,-10) L5(4,-10) L6(5,-10) L7(6,-10) L8(7,-10) L9(8,-10) L10(9,-10) L11(10,-10) L12(11,-10) L13(12,-10) L14(13,-10) L15(14,-10) L16(15,-10) L17(16,-10) L18(17,-10) L19(18,-10) L20(19,-10) L21(20,-10) L22(21,-10) M1(0,-11) M2(1,-11) M3(2,-11) M4(3,-11) M5(4,-11) M6(5,-11) M7(6,-11) M8(7,-11) M9(8,-11) M10(9,-11) M11(10,-11) M12(11,-11) M13(12,-11) M14(13,-11) M15(14,-11) M16(15,-11) M17(16,-11) M18(17,-11) M19(18,-11) M20(19,-11) M21(20,-11) M22(21,-11) N1(0,-12) N2(1,-12) N3(2,-12) N4(3,-12) N5(4,-12) N6(5,-12) N7(6,-12) N8(7,-12) N9(8,-12) N10(9,-12) N11(10,-12) N12(11,-12) N13(12,-12) N14(13,-12) N15(14,-12) N16(15,-12) N17(16,-12) N18(17,-12) N19(18,-12) N20(19,-12) N21(20,-12) N22(21,-12) P1(0,-13) P2(1,-13) P3(2,-13) P4(3,-13) P5(4,-13) P6(5,-13) P7(6,-13) P8(7,-13) P9(8,-13) P10(9,-13) P11(10,-13) P12(11,-13) P13(12,-13) P14(13,-13) P15(14,-13) P16(15,-13) P17(16,-13) P18(17,-13) P19(18,-13) P20(19,-13) P21(20,-13) P22(21,-13) R1(0,-14) R2(1,-14) R3(2,-14) R4(3,-14) R5(4,-14) R6(5,-14) R7(6,-14) R8(7,-14) R9(8,-14) R10(9,-14) R11(10,-14) R12(11,-14) R13(12,-14) R14(13,-14) R15(14,-14) R16(15,-14) R17(16,-14) R18(17,-14) R19(18,-14) R20(19,-14) R21(20,-14) R22(21,-14) T1(0,-15) T2(1,-15) T3(2,-15) T4(3,-15) T5(4,-15) T6(5,-15) T7(6,-15) T8(7,-15) T9(8,-15) T10(9,-15) T11(10,-15) T12(11,-15) T13(12,-15) T14(13,-15) T15(14,-15) T16(15,-15) T17(16,-15) T18(17,-15) T19(18,-15) T20(19,-15) T21(20,-15) T22(21,-15) U1(0,-16) U2(1,-16) U3(2,-16) U4(3,-16) U5(4,-16) U6(5,-16) U7(6,-16) U8(7,-16) U9(8,-16) U10(9,-16) U11(10,-16) U12(11,-16) U13(12,-16) U14(13,-16) U15(14,-16) U16(15,-16) U17(16,-16) U18(17,-16) U19(18,-16) U20(19,-16) U21(20,-16) U22(21,-16) V1(0,-17) V2(1,-17) V3(2,-17) V4(3,-17) V5(4,-17) V6(5,-17) V7(6,-17) V8(7,-17) V9(8,-17) V10(9,-17) V11(10,-17) V12(11,-17) V13(12,-17) V14(13,-17) V15(14,-17) V16(15,-17) V17(16,-17) V18(17,-17) V19(18,-17) V20(19,-17) V21(20,-17) V22(21,-17) W1(0,-18) W2(1,-18) W3(2,-18) W4(3,-18) W5(4,-18) W6(5,-18) W7(6,-18) W8(7,-18) W9(8,-18) W10(9,-18) W11(10,-18) W12(11,-18) W13(12,-18) W14(13,-18) W15(14,-18) W16(15,-18) W17(16,-18) W18(17,-18) W19(18,-18) W20(19,-18) W21(20,-18) W22(21,-18) Y1(0,-19) Y2(1,-19) Y3(2,-19) Y4(3,-19) Y5(4,-19) Y6(5,-19) Y7(6,-19) Y8(7,-19) Y9(8,-19) Y10(9,-19) Y11(10,-19) Y12(11,-19) Y13(12,-19) Y14(13,-19) Y15(14,-19) Y16(15,-19) Y17(16,-19) Y18(17,-19) Y19(18,-19) Y20(19,-19) Y21(20,-19) Y22(21,-19)
C11204_01
  round 0.889 hole 0.635: 1(1.45,2.8) 2(1.45,4.07) 3(1.45,5.34) 4(1.45,6.61) 5(1.45,7.88) 6(1.45,9.15) 7(1.45,10.42) 8(1.45,11.69) 9(1.45,12.96) 10(1.45,14.23) 11(17.95,14.23) 12(17.95,12.96) 13(17.95,11.69) 14(17.95,10.42) 15(17.95,9.15) 16(17.95,7.88)
CFP16ANDSOIC16
  rect 4.5x0.48 smd: 1(-0.229,9.601) 2(-0.229,8.331) 3(-0.229,7.061) 4(-0.229,5.791) 5(-0.229,4.521) 6(-0.229,3.251) 7(-0.229,1.981) 8(-0.229,0.711) 9(6.96,0.711) 10(6.96,1.981) 11(6.96,3.251) 12(6.96,4.521) 13(6.96,5.791) 14(6.96,7.061) 15(6.96,8.331) 16(6.96,9.601)
CHV
  round 1.5 hole 0.9: 1(0,0) 2(6.299,0)
CON-BNC-S-T
  round 2.54 hole 1.524: 1(0,0) 2(2.54,-2.54) 3(2.54,2.54) 4(-2.54,2.54) 5(-2.54,-2.54)
CONN_USB_B_CHL
  round 0.94 hole 0.94 unplated: (-2.2,1.445) (2.2,1.445)
  rect 0.508x2.032 smd: 1(-1.6,4.045) 2(-0.8,4.045) 3(0,4.045) 4(0.8,4.045) 5(1.6,4.045)
  rect 2.489x2.184 smd: 6(4.2,3.795) 7(4.2,-1.505) 8(-4.2,-1.505) 9(-4.2,3.795)
CT1206
  rect 1.651x1.88 smd: 1(-1.632,0) 2(1.632,0)
DIP8-100-300
  rect 1.27x1.27 hole 0.813: 1(-3.81,-3.81)
  round 1.27 hole 0.813: 2(-1.27,-3.81) 3(1.27,-3.81) 4(3.81,-3.81) 5(3.81,3.81) 6(1.27,3.81) 7(-1.27,3.81) 8(-3.81,3.81)
GND40
  round 1.524 hole 1.016: 1(0,0)
INDC2-200-M
  round 2.286 hole 1.397: 1(-2.54,0) 2(2.54,0)
JTAG-14P
  rect 1.397x1.397 hole 1.016: 1(5.131,3.226)
  round 1.397 hole 1.016: 2(5.131,5.766) 3(7.671,3.226) 4(7.671,5.766) 5(10.211,3.226) 6(10.211,5.766) 7(12.751,3.226) 8(12.751,5.766) 9(15.291,3.226) 10(15.291,5.766) 11(17.831,3.226) 12(17.831,5.766) 13(20.371,3.226) 14(20.371,5.766)
LASER22-4816-M
  round 1.016 hole 1.016 unplated: (-3.988,3.734) (-3.988,-10.516) (0.711,3.734) (0.711,-10.516) (5.69,3.734) (5.69,-10.516) (10.312,1.397) (10.312,-3.404) (10.312,-8.204)
  round 1.778 hole 1.778 unplated: (4.089,1.397) (4.089,-8.204)
  rect 2.54x0.508 smd: 1(0,0) 2(0,-0.813) 3(0,-1.6) 4(0,-2.388) 5(0,-3.2) 6(0,-3.988) 7(0,-4.801) 8(0,-5.588) 9(0,-6.401) 10(0,-7.188) 11(8.204,-6.807) 12(8.204,-5.994) 13(8.204,-5.207) 14(8.204,-4.394) 15(8.204,-3.607) 16(8.204,-2.794) 17(8.204,-2.007) 18(8.204,-1.194) 19(8.204,-0.406) 20(8.204,0.406)
  rect 2.032x2.032 hole 1.27: 23(-21.311,-10.516) 24(-11.303,-10.516) 26(-1.803,-10.516) 29(8.204,-10.516) 37(-6.807,3.734) 38(-16.307,3.734) 39(-26.289,3.734) 40(-26.391,-4.851) 41(-6.807,-7.341) 42(-6.807,-1.956)
  rect 2.032x2.032 hole 1.016: 34(3.2,3.734)
MAA05A
  rect 1.168x0.356 smd: 1(-0.978,0.65) 2(-0.978,0) 3(-0.978,-0.65) 4(0.978,-0.65) 5(0.978,0.65)
QFN65P500X500-21
  rect 1.049x0.35 smd: 1(-2.349,1.301) 2(-2.349,0.65) 3(-2.349,0) 4(-2.349,-0.65) 5(-2.349,-1.301) 11(2.349,-1.301) 12(2.349,-0.65) 13(2.349,0) 14(2.349,0.65) 15(2.349,1.301)
  rect 0.35x1.049 smd: 6(-1.301,-2.349) 7(-0.65,-2.349) 8(0,-2.349) 9(0.65,-2.349) 10(1.301,-2.349) 16(1.301,2.349) 17(0.65,2.349) 18(0,2.349) 19(-0.65,2.349) 20(-1.301,2.349)
  rect 3x3 smd: 21(0,0)
SC0402
  rect 0.635x0.508 smd: 1(-0.508,0) 2(0.508,0)
SC0603
  rect 0.813x0.889 smd: 1(-0.762,0) 2(0.762,0)
SD0805
  rect 1.016x1.27 smd: 1(-1.143,0) 2(1.143,0)
SIP-2P
  rect 1.524x1.524 hole 1.016: 1(-1.27,0)
  round 1.524 hole 1.016: 2(1.27,0)
SIP-3P
  rect 1.524x1.524 hole 1.016: 1(-2.54,0)
  round 1.524 hole 1.016: 2(0,0) 3(2.54,0)
SIP-4P-156
  rect 2.794x2.794 hole 1.778: 1(-5.944,0)
  round 2.794 hole 1.778: 2(-1.981,0) 3(1.981,0) 4(5.944,0)
SL0805
  rect 1.016x1.27 smd: 1(-0.889,0) 2(0.889,0)
SL1206
  rect 1.397x1.651 smd: 1(-1.397,0) 2(1.397,0)
SL1210
  rect 1.397x2.413 smd: 1(-1.397,0) 2(1.397,0)
SL1812
  rect 1.524x3.175 smd: 1(-2.286,0) 2(2.286,0)
SO16_50P300X413
  rect 2.032x0.635 smd: 1(-4.686,4.445) 2(-4.686,3.175) 3(-4.686,1.905) 4(-4.686,0.635) 5(-4.686,-0.635) 6(-4.686,-1.905) 7(-4.686,-3.175) 8(-4.686,-4.445) 9(4.686,-4.445) 10(4.686,-3.175) 11(4.686,-1.905) 12(4.686,-0.635) 13(4.686,0.635) 14(4.686,1.905) 15(4.686,3.175) 16(4.686,4.445)
SOP8-50-160
  rect 0.635x1.778 smd: 1(-1.905,-2.794) 2(-0.635,-2.794) 3(0.635,-2.794) 4(1.905,-2.794) 5(1.905,2.794) 6(0.635,2.794) 7(-0.635,2.794) 8(-1.905,2.794)
SOP56-25-300
  rect 0.305x1.778 smd: 1(-8.572,-4.953) 2(-7.938,-4.953) 3(-7.303,-4.953) 4(-6.668,-4.953) 5(-6.032,-4.953) 6(-5.397,-4.953) 7(-4.763,-4.953) 8(-4.128,-4.953) 9(-3.493,-4.953) 10(-2.857,-4.953) 11(-2.223,-4.953) 12(-1.587,-4.953) 13(-0.953,-4.953) 14(-0.318,-4.953) 15(0.318,-4.953) 16(0.953,-4.953) 17(1.587,-4.953) 18(2.223,-4.953) 19(2.857,-4.953) 20(3.493,-4.953) 21(4.128,-4.953) 22(4.763,-4.953) 23(5.397,-4.953) 24(6.032,-4.953) 25(6.668,-4.953) 26(7.303,-4.953) 27(7.938,-4.953) 28(8.572,-4.953) 29(8.572,4.953) 30(7.938,4.953) 31(7.303,4.953) 32(6.668,4.953) 33(6.032,4.953) 34(5.397,4.953) 35(4.763,4.953) 36(4.128,4.953) 37(3.493,4.953) 38(2.857,4.953) 39(2.223,4.953) 40(1.587,4.953) 41(0.953,4.953) 42(0.318,4.953) 43(-0.318,4.953) 44(-0.953,4.953) 45(-1.587,4.953) 46(-2.223,4.953) 47(-2.857,4.953) 48(-3.493,4.953) 49(-4.128,4.953) 50(-4.763,4.953) 51(-5.397,4.953) 52(-6.032,4.953) 53(-6.668,4.953) 54(-7.303,4.953) 55(-7.938,4.953) 56(-8.572,4.953)
SOT23-5
  rect 0.508x1.016 smd: 1(-0.94,-1.295) 2(0,-1.295) 3(0.94,-1.295) 4(0.94,1.295) 5(-0.94,1.295)
SR0603
  rect 0.813x0.889 smd: 1(-0.762,0) 2(0.762,0)
STC3528
  rect 2.032x2.286 smd: 1(-1.651,0) 2(1.651,0)
SX4-0705
  rect 1.778x2.032 smd: 1(-2.54,-2.101) 2(2.54,-2.101) 3(2.54,2.101) 4(-2.54,2.101)
TP-40-SMD
  round 1.016 smd: 1(0,0)
USB_TYPEC_PLUG_V1
  rect 1x2.1 hole 0.6x1.6 unplated: (-4.32,0.89) (4.32,0.89)
  rect 1.1x2.6 hole 0.6x2.1 unplated: (-4.32,-4.47) (4.32,-4.47)
  rect 0.33x0.838 smd: 1(-3,1.27) 2(-2.5,1.27) 3(-2,1.27) 4(-1.5,1.27) 5(-1,1.27) 6(-0.5,1.27) 7(0.5,1.27) 8(1,1.27) 9(1.5,1.27) 10(2,1.27) 11(2.5,1.27) 12(3,1.27) 14(2.25,0) 15(1.75,0) 16(1.25,0) 17(0.75,0) 18(0.25,0) 19(-0.25,0) 20(-0.75,0) 21(-1.25,0) 22(-1.75,0) 23(-2.25,0)
  rect 1x0.7 smd: 13(3.1,0) 24(-3.1,0)
XO75L
  rect 1.6x1.499 smd: 1(-2.54,-1.956) 2(0,-1.956) 3(2.54,-1.956) 4(2.54,1.956) 5(0,1.956) 6(-2.54,1.956)
XTAL2-200A
  round 1.27 hole 0.813: 1(-2.54,0) 2(2.54,0)

## Nets
1.0V: C36.1 C37.1 C38.1 C39.1 C40.1 C41.1 C42.1 C44.1 C65.1 C66.1 C67.1 C68.1 C69.1 C70.1 C71.1 C72.1 C73.1 C74.1 C75.1 C76.1 C77.1 C78.1 C85.1 C86.1 C87.1 C88.1 R184.1 R193.2 U3.D6(MGTAVCC_1) U3.D10(MGTAVCC_2) U3.E8(MGTAVCC_5) U3.F7(MGTAVCC_3) U3.F9(MGTAVCC_4) U3.H8(VCCINT#H8) U3.H10(VCCINT#H10) U3.J7(VCCINT#J7) U3.J9(VCCINT#J9) U3.J11(VCCBRAM#J11) U3.K8(VCCINT#K8) U3.L7(VCCINT#L7) U3.L11(VCCBRAM#L11) U3.M8(VCCINT#M8) U3.N7(VCCINT#N7) U3.N11(VCCBRAM#N11) U3.P8(VCCINT#P8) U3.P10(VCCINT#P10) U3.R7(VCCINT#R7) U3.R9(VCCINT#R9) U3.T8(VCCINT#T8) U3.T10(VCCINT#T10) UNK1.0V1.1
1.0V_OUT: C145.1 R171.1 R175.2 R193.1 U18.1(OUT4) U18.18(OUT1) U18.19(OUT2) U18.20(OUT3)
1.2V: C46.1 C47.1 C48.1 C49.1 R34.1 R182.2 R189.1 U3.B5(MGTAVTT_1) U3.B7(MGTAVTT_2) U3.B9(MGTAVTT_3) U3.B11(MGTAVTT_4) U3.C4(MGTAVTT_5) U3.C8(MGTAVTT_6) UNK1.2V1.1
1.2V_OUT: C137.1 R164.1 R168.2 R182.1 U17.1(OUT4) U17.18(OUT1) U17.19(OUT2) U17.20(OUT3)
1.8V: C79.1 C80.1 C81.1 C82.1 C83.1 C84.1 L2.2 R180.2 R188.1 U3.H12(VCCAUX#H12) U3.K12(VCCAUX#K12) U3.M12(VCCAUX#M12) U3.P12(VCCAUX#P12) U3.R11(VCCAUX#R11) UNK1.8V1.1
1.8V_OUT: C153.1 R180.1 R181.1 R186.2 U20.1(OUT4) U20.18(OUT1) U20.19(OUT2) U20.20(OUT3)
2.5V: C9.1 C10.1 C11.1 C12.1 C13.1 C14.1 C23.1 C24.1 C25.1 C26.1 C27.1 C28.1 R177.2 R187.1 U3.C1(VCCO_35_1) U3.F2(VCCO_35_2) U3.G19(VCCO_15_1) U3.H6(VCCO_35_3) U3.H16(VCCO_15_2) U3.J3(VCCO_35_4) U3.J13(VCCO_15_3) U3.K20(VCCO_15_4) U3.L17(VCCO_15_5) U3.M4(VCCO_35_5) U3.N1(VCCO_35_6) U3.N21(VCCO_15_6) UNK2.5V1.1
2.5V_OUT: C144.1 R170.1 R174.2 R177.1 U19.1(OUT4) U19.18(OUT1) U19.19(OUT2) U19.20(OUT3)
3.3V: C2.2 C6.1 C7.1 C8.1 C15.1 C16.1 C17.1 C18.1 C19.1 C20.1 C21.1 C22.1 C29.1 C30.1 C31.1 C32.1 C33.1 C34.1 C57.1 C58.1 C59.1 C60.1 C61.1 C89.1 C90.1 C91.1 C92.1 C93.1 C94.1 C95.1 C96.1 C97.1 C98.1 C99.1 C108.2 C109.2 C110.2 C111.2 C112.2 C113.2 C114.2 C124.1 C125.1 C131.1 C132.1 C164.2 C165.2 C166.2 C167.2 DR1.2 DR2.2 DR3.2 DR4.2 DR5.2 DR6.2 DR9.2 DR10.2 DR11.2 DR17.1 DR18.1 J7.2(VREF) L1.1 L3.1 L4.2 L5.2 O1.6(VDD) R3.2 R5.2 R9.2 R10.1 R25.2 R35.2 R36.2 R37.2 R42.1 R43.2 R44.2 R45.2 R46.2 R60.2 R61.2 R62.2 R63.2 R64.2 R65.2 R176.2 R185.1 U2.2(VCC) U3.A17(VCCO_16_1) U3.AA7(VCCO_34_1) U3.AA17(VCCO_13_1) U3.AB4(VCCO_34_2) U3.AB14(VCCO_13_2) U3.B14(VCCO_16_2) U3.C21(VCCO_16_3) U3.D18(VCCO_16_4) U3.E15(VCCO_16_5) U3.F12(VCCO_0_1) U3.F22(VCCO_16_6) U3.M14(VCCO_14_1) U3.P18(VCCO_14_2) U3.R5(VCCO_34_3) U3.R15(VCCO_14_3) U3.T2(VCCO_34_4) U3.T12(VCCO_0_2) U3.T22(VCCO_14_4) U3.U8(CFGBVS_0) U3.U11(M0_0) U3.U19(VCCO_14_5) U3.V6(VCCO_34_5) U3.V16(VCCO_13_3) U3.W3(VCCO_34_6) U3.W13(VCCO_13_4) U3.Y10(VCCO_13_5) U3.Y20(VCCO_14_6) U4.5(VCCI/VCCO) U5.2(VCC) U10.4(G) U10.16(VCC) U11.4(EN) U11.16(VCC) U12.6(VCC#6) U12.18(VCC#18) U12.24(VCC#24) U12.34(VCC#34) U12.39(VCC#39) U12.50(VCC#50) U14.8(VCC) UNK3.3V2.1
3.3V_OUT: C136.1 R163.1 R167.2 R176.1 U16.1(OUT4) U16.18(OUT1) U16.19(OUT2) U16.20(OUT3)
3.3V_OUT_DET: C159.1 R157.1 R159.2 R161.1 R162.2 R190.1 R192.2 U21.1(OUT4) U21.18(OUT1) U21.19(OUT2) U21.20(OUT3)
5.0V_HV: C101.2 C154.1 C155.1 C158.1 C160.1 L7.2 R51.1 R136.2 R140.2 R195.1 R196.1 TP9.1 U6.1(VCC) U21.5(IN1) U21.6(IN2) U21.7(IN3) U21.8(IN4) U21.10(BIAS) U21.11(EN)
+5VIN: J18.2 L6.1 L7.1 R179.2 R194.1
AVCC: C116.2 C117.2 C118.2 C119.2 L3.2 U12.10(AVCC) U12.14(AVCC#14)
VCC5V0: C134.1 C135.1 C138.1 C139.1 C142.1 C143.1 C146.1 C147.1 C150.1 C151.1 C152.1 C156.1 L6.2 R197.2 R199.2 R201.2 R203.2 U16.5(IN1) U16.6(IN2) U16.7(IN3) U16.8(IN4) U16.10(BIAS) U16.11(EN) U17.5(IN1) U17.6(IN2) U17.7(IN3) U17.8(IN4) U17.10(BIAS) U17.11(EN) U18.5(IN1) U18.6(IN2) U18.7(IN3) U18.8(IN4) U18.10(BIAS) U18.11(EN) U19.5(IN1) U19.6(IN2) U19.7(IN3) U19.8(IN4) U19.10(BIAS) U19.11(EN) U20.5(IN1) U20.6(IN2) U20.7(IN3) U20.8(IN4) U20.10(BIAS) U20.11(EN)
VCCADC: C63.1 C64.1 L2.1 U3.K10(VCCADC_0)
0: C2.1 C3.1 C4.1 C6.2 C7.2 C8.2 C9.2 C10.2 C11.2 C12.2 C13.2 C14.2 C15.2 C16.2 C17.2 C18.2 C19.2 C20.2 C21.2 C22.2 C23.2 C24.2 C25.2 C26.2 C27.2 C28.2 C29.2 C30.2 C31.2 C32.2 C33.2 C34.2 C36.2 C37.2 C38.2 C39.2 C40.2 C41.2 C42.2 C44.2 C46.2 C47.2 C48.2 C49.2 C57.2 C58.2 C59.2 C60.2 C61.2 C63.2 C64.2 C65.2 C66.2 C67.2 C68.2 C69.2 C70.2 C71.2 C72.2 C73.2 C74.2 C75.2 C76.2 C77.2 C78.2 C79.2 C80.2 C81.2 C82.2 C83.2 C84.2 C85.2 C86.2 C87.2 C88.2 C89.2 C90.2 C91.2 C92.2 C93.2 C94.2 C95.2 C96.2 C97.2 C98.2 C99.2 C101.1 C102.2 C103.2 C104.2 C105.2 C106.1 C107.1 C108.1 C109.1 C110.1 C111.1 C112.1 C113.1 C114.1 C115.2 C116.1 C117.1 C118.1 C119.1 C121.2 C122.2 C123.2 C124.2 C125.2 C128.2 C129.2 C130.2 C131.2 C132.2 C134.2 C135.2 C136.2 C137.2 C138.2 C139.2 C140.2 C141.2 C142.2 C143.2 C144.2 C145.2 C146.2 C147.2 C148.2 C149.2 C150.2 C151.2 C152.2 C153.2 C154.2 C155.2 C156.2 C157.2 C158.2 C159.2 C160.2 C161.2 C164.1 C165.1 C166.1 C167.1 D1.1(CATHODE) D2.1(CATHODE) D3.1(CATHODE) D4.1(CATHODE) D5.1(CATHODE) D6.1(CATHODE) D7.1(CATHODE) D8.1(CATHODE) D11.2(CATHODE) D16.2(CATHODE) D17.1(CATHODE) D18.1(CATHODE) D19.1(CATHODE) D20.1(CATHODE) D21.1(CATHODE) DR7.2 DR8.2 DR13.2 DR15.2 DR16.2 DU1.1(VEET_1) DU1.10(VEER_1) DU1.11(VEER_2) DU1.14(VEER_3) DU1.17(VEET_2) DU1.20(VEET_3) DU1.23(GND3) DU1.24(GND4) DU1.26(GND6) DU1.29(GND9) DU1.34(GND14) DU1.37(GND17) DU1.38(GND18) DU1.39(GND19) DU1.40(GND20) DU1.41(GND21) DU1.42(GND22) J1.2 J1.3 J1.4 J1.5 J2.2 J2.3 J2.4 J2.5 J3.2 J3.3 J3.4 J3.5 J4.2 J4.3 J4.4 J4.5 J5.2 J5.3 J5.4 J5.5 J6.2 J6.3 J6.4 J6.5 J7.1(G1) J7.3(G2) J7.5(G3) J7.7(G4) J7.9(G5) J7.11(G6) J7.13(G7) J8.1 J9.1(GND) J10.1(GND) J11.1(GND) J12.1(GND) J15.1 J16.1(GND#1) J16.2(GND#2) J16.3(GND#3) J16.4(GND#4) J16.5(GND#5) J16.6(GND#6) J16.A2 J16.A4 J16.A6 J16.A8 J16.A10 J16.A12 J16.A14 J16.A16 J16.A18 J16.A20 J16.A22 J16.A24 J16.A26 J16.A28 J16.A30 J16.A32 J16.A34 J16.A36 J16.A38 J16.A40 J16.B1 J16.B3 J16.B5 J16.B7 J16.B9 J16.B11 J16.B13 J16.B15 J16.B17 J16.B19 J16.B21 J16.B23 J16.B25 J16.B27 J16.B29 J16.B31 J16.B33 J16.B35 J16.B37 J16.B39 J17.1(GND#1) J17.2(GND#2) J17.3(GND#3) J17.4(GND#4) J17.5(GND#5) J17.6(GND#6) J17.A1 J17.A2 J17.A5 J17.A6 J17.A9 J17.A10 J17.A12 J17.A14 J17.A16 J17.A18 J17.A20 J17.A22 J17.A25 J17.A28 J17.A30 J17.A32 J17.A34 J17.A36 J17.A38 J17.A40 J17.B3 J17.B4 J17.B7 J17.B8 J17.B11 J17.B13 J17.B15 J17.B17 J17.B19 J17.B21 J17.B23 J17.B24 J17.B27 J17.B28 J17.B29 J17.B31 J17.B33 J17.B35 J17.B37 J17.B39 J18.4 O1.3(GND) R6.1 R7.2 R20.2 R23.2 R24.2 R27.2 R29.2 R31.2 R33.2 R47.1 R53.1 R165.2 R166.2 R172.2 R173.2 R178.2 R183.2 R191.2 R198.1 R200.1 R202.1 R204.1 SW2.1 U1.2(GND) U2.3(GND) U3.A2(GND#A2) U3.A3(GND#A3) U3.A5(GND#A5) U3.A7(GND#A7) U3.A9(GND#A9) U3.A11(GND#A11) U3.A12(GND#A12) U3.A22(GND#A22) U3.AA2(GND#AA2) U3.AA12(GND#AA12) U3.AA22(GND#AA22) U3.AB9(GND#AB9) U3.AB19(GND#AB19) U3.B3(GND#B3) U3.B12(GND#B12) U3.B19(GND#B19) U3.C3(GND#C3) U3.C6(GND#C6) U3.C10(GND#C10) U3.C12(GND#C12) U3.C16(GND#C16) U3.D3(GND#D3) U3.D4(GND#D4) U3.D8(GND#D8) U3.D12(GND#D12) U3.D13(GND#D13) U3.E4(GND#E4) U3.E5(GND#E5) U3.E7(GND#E7) U3.E9(GND#E9) U3.E11(GND#E11) U3.E12(VCCBATT_0) U3.E20(GND#E20) U3.F5(GND#F5) U3.F11(GND#F11) U3.F17(GND#F17) U3.G5(GND#G5) U3.G6(GND#G6) U3.G7(GND#G7) U3.G8(GND#G8) U3.G9(GND#G9) U3.G10(GND#G10) U3.G12(GND#G12) U3.G14(GND#G14) U3.H1(GND#H1) U3.H7(GND#H7) U3.H9(GND#H9) U3.H11(GND#H11) U3.H21(GND#H21) U3.J8(GND#J8) U3.J10(GND#J10) U3.J12(GND#J12) U3.J18(GND#J18) U3.K5(GND#K5) U3.K7(GND#K7) U3.K9(GNDADC_0) U3.K11(GND#K11) U3.K15(GND#K15) U3.L2(GND#L2) U3.L8(GND#L8) U3.L9(VREFN_0) U3.L10(VP_0) U3.L22(GND#L22) U3.M7(GND#M7) U3.M9(VN_0) U3.M10(VREFP_0) U3.M11(GND#M11) U3.M19(GND#M19) U3.N6(GND#N6) U3.N8(GND#N8) U3.N9(DXN_0) U3.N10(DXP_0) U3.N16(GND#N16) U3.P3(GND#P3) U3.P7(GND#P7) U3.P9(GND#P9) U3.P11(GND#P11) U3.P13(GND#P13) U3.R8(GND#R8) U3.R10(GND#R10) U3.R12(GND#R12) U3.R20(GND#R20) U3.T7(GND#T7) U3.T9(GND#T9) U3.T11(GND#T11) U3.T17(GND#T17) U3.U4(GND#U4) U3.U10(M1_0) U3.U14(GND#U14) U3.U22(IO_L3P_T0_DQS_PUDC_B_14) U3.V1(GND#V1) U3.V11(GND#V11) U3.V21(GND#V21) U3.W8(GND#W8) U3.W18(GND#W18) U3.Y5(GND#Y5) U3.Y15(GND#Y15) U4.2(VEE) U5.10(VSS) U6.2(GND#2) U6.5(GND#5) U6.8(GND#8) U6.15(GND#15) U7.1(GS0) U7.2(GND) U7.5(GS1) U8.1(A1 GND) U8.12(A12 GND) U8.13(B1 GND) U8.24(B12 GND) U9.1(A1 GND) U9.12(A12 GND) U9.13(B1 GND) U9.24(B12 GND) U10.8(GND) U10.12(/G) U11.8(GND) U11.12(EN*) U12.4(GND#4) U12.7(GND#7) U12.13(AGND) U12.17(AGND#17) U12.19(GND#19) U12.33(GND#33) U12.35(GND#35) U12.48(GND#48) U13.5(GND) U13.6 U13.7 U13.8 U13.9 U14.2(A1) U14.3(A2) U14.4(VSS) U14.7(WP) U15.1 U16.12(GND) U16.21(PAD) U17.12(GND) U17.21(PAD) U18.12(GND) U18.21(PAD) U19.12(GND) U19.21(PAD) U20.12(GND) U20.21(PAD) U21.12(GND) U21.21(PAD)
/BUTTON_LOW: R7.1 SW1.1
CCLK: U3.L12(CCLK_0) U5.16(C)
DONE: D9.2(ANODE) R44.1 U3.G11(DONE_0)
FIFOADR0: U3.V18(IO_L14P_T2_SRCC_14) U12.44(PA4/FIFOADR0)
FIFOADR1: U3.AA21(IO_L8N_T1_D12_14) U12.45(PA5/FIFOADR1)
FLASH_CS_B: R37.1 U3.T19(IO_L6P_T0_FCS_B_14) U5.7(\\S)
FLASH_DQ0: U3.P22(IO_L1P_T0_D00_MOSI_14) U5.15(DQ0)
FLASH_DQ1: U3.R22(IO_L1N_T0_D01_DIN_14) U5.8(DQ1)
FLASH_DQ2: R36.1 U3.P21(IO_L2P_T0_D02_14) U5.9(\\W/VPP/DQ2)
FLASH_DQ3: R35.1 U3.R21(IO_L2N_T0_D03_14) U5.1(\\H\O\L\D/DQ3)
FPGA_LED1: R11.1 TP1.1(TP) U3.A20(IO_L16N_T2_16)
FPGA_LED2: R12.1 TP2.1(TP) U3.C22(IO_L20P_T3_16)
FPGA_LED3: R13.1 TP3.1(TP) U3.D21(IO_L23N_T3_16)
FPGA_LED4: R14.1 TP4.1(TP) U3.E21(IO_L23P_T3_16)
FPGA_LED5: R15.1 TP5.1(TP) U3.E22(IO_L22P_T3_16)
FPGA_LED6: R16.1 TP6.1(TP) U3.F20(IO_L18N_T2_16)
FPGA_LED7: R17.1 TP7.1(TP) U3.G21(IO_L24P_T3_16)
FPGA_LED8: R18.1 TP8.1(TP) U3.G22(IO_L24N_T3_16)
GTP0_RD+: C126.1 DU1.13(RD_P)
GTP0_RD-: C120.1 DU1.12(RD_N)
GTP0_TD+: C127.2 DU1.18(TD_P) R67.2
GTP0_TD-: C133.2 DU1.19(TD_N) R67.1
GTP0_TX_DETECT: D13.1(CATHODE) DR3.1 DU1.6(MOD_ABS)
